# Altium PCB BaseBoard.PcbDoc
Units mm, origin at the board's own origin, x right, y up, seen from the top; angles counter-clockwise.
Board outline 99.92 x 100.03 mm, 2 copper layers (Top Layer, Bottom Layer); 120 components, 8 nets, 410 pads, 250 vias.
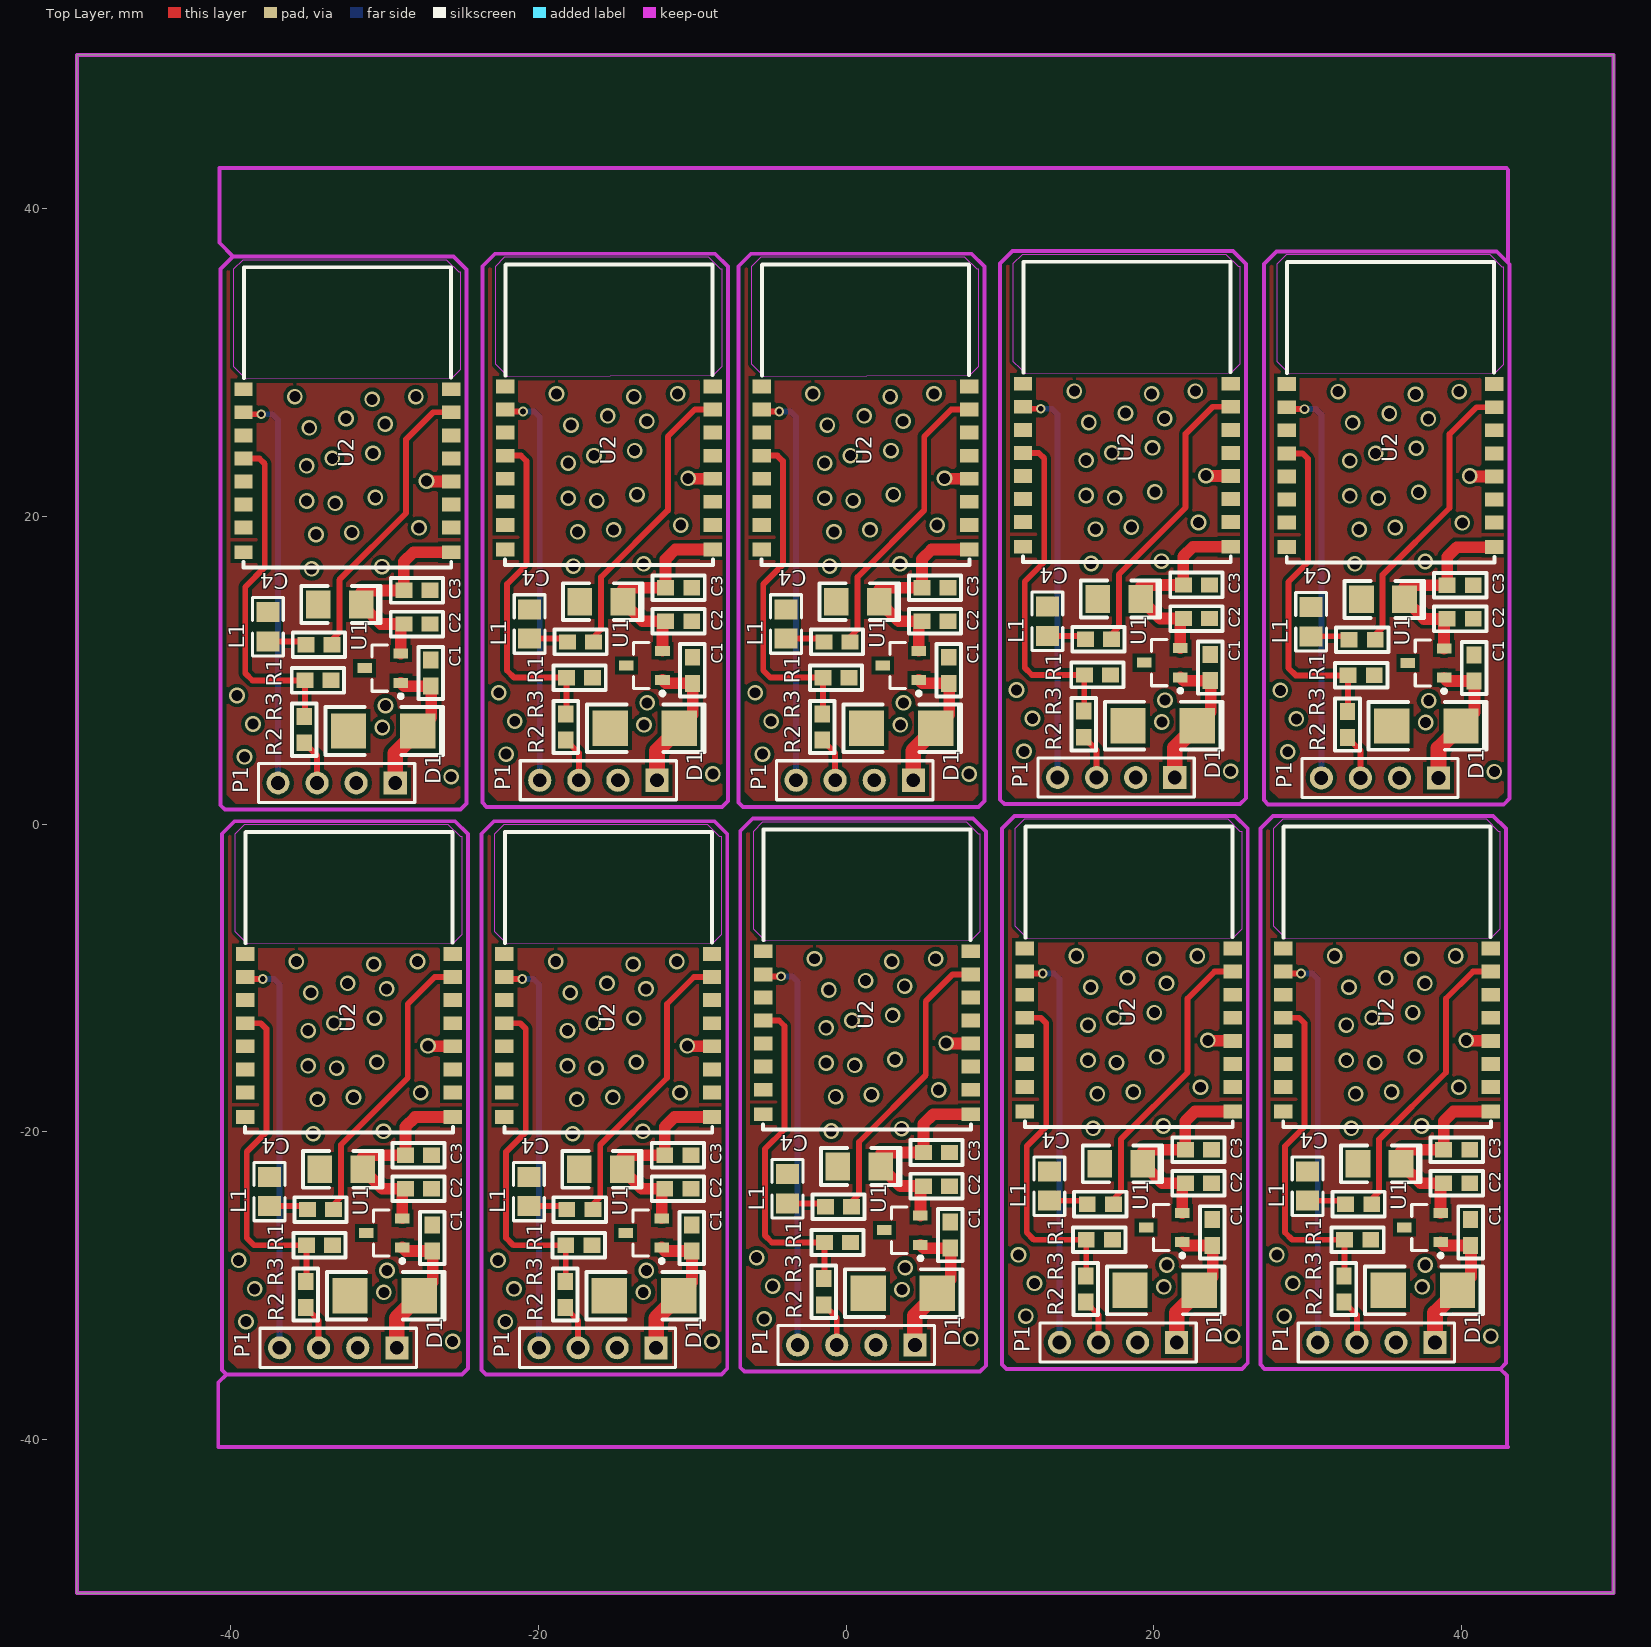
[diagram p0: Top Layer view]
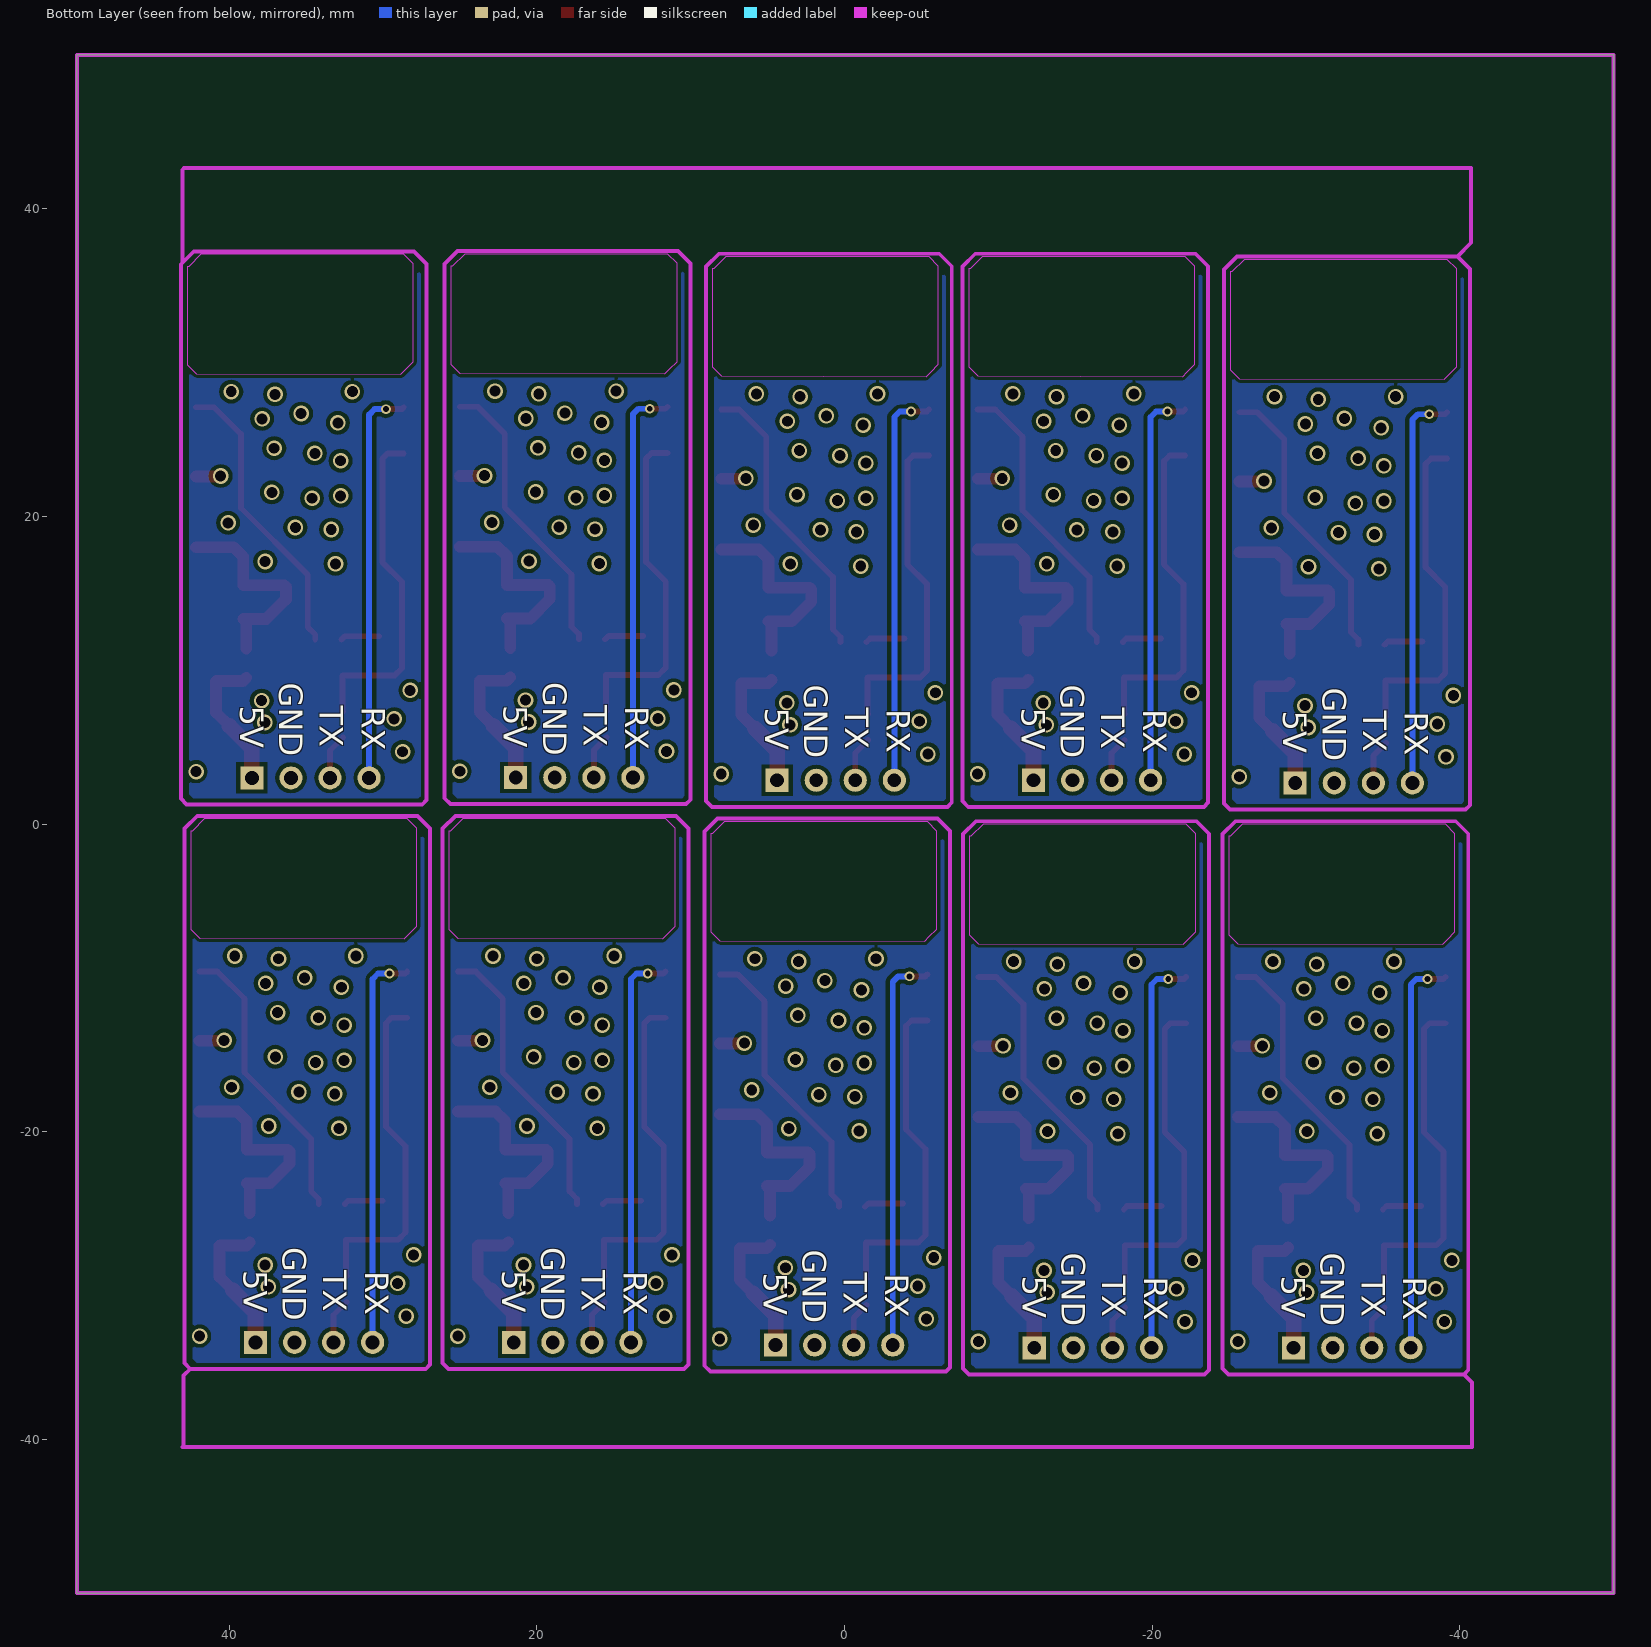
[diagram p1: Bottom Layer view, seen from below]

## Layer stack, top to bottom
Top Solder: solder mask 0.0102, Solder Resist, Dk 3.5
Top Layer: signal copper 0.0356
Dielectric 1: dielectric 0.32, FR-4, Dk 4.8
Bottom Layer: signal copper 0.0356
Bottom Solder: solder mask 0.0102, Solder Resist, Dk 3.5

## Board outline
-50.013,-50.013 -50.013,50.013 49.911,50.013 49.911,-50.013

## Design rules (kind name [scope] priority, off if disabled: settings)
Clearance [All] p1: gap=0.254
PolygonConnect [All] p1: connectstyle=Relief reliefconductorwidth=0.254 reliefentries=4 polygonreliefangle="90 Angle" airgapwidth=0.254
RoutingVias [All] p1: holewidth=0.711 width=1.016 viastyle="Through Hole" minholewidth=0.381 minwidth=0.635 maxholewidth=0.711 maxwidth=1.016
SolderMaskExpansion [All] p1: expansion=0.102
Width [All] p1: maxlimit=1.524 minlimit=0.254 preferedwidth=0.508
30 further rules are at their usual default settings.

## Components (designator, comment, footprint, x,y, rotation, side; value= is the part's Value field where it differs from the comment)
C1 "1uF" 0603 -27.011,9.816 r270 top
C1 "1uF" 0603 -9.993,9.994 r270 top
C1 "1uF" 0603 6.677,9.994 r270 top
C1 "1uF" 0603 23.677,10.172 r270 top
C1 "1uF" 0603 40.829,10.146 r270 top
C1 "1uF" 0603 40.601,-26.557 r270 top
C1 "1uF" 0603 23.804,-26.557 r270 top
C1 "1uF" 0603 6.778,-26.734 r270 top
C1 "1uF" 0603 -10.044,-26.912 r270 top
C1 "1uF" 0603 -26.909,-26.912 r270 top
C2 "1uF" 0603 -27.901,13.015 r180 top
C2 "1uF" 0603 -10.883,13.193 r180 top
C2 "1uF" 0603 5.787,13.193 r180 top
C2 "1uF" 0603 22.787,13.37 r180 top
C2 "1uF" 0603 39.939,13.345 r180 top
C2 "1uF" 0603 39.711,-23.358 r180 top
C2 "1uF" 0603 22.914,-23.358 r180 top
C2 "1uF" 0603 5.888,-23.536 r180 top
C2 "1uF" 0603 -10.934,-23.714 r180 top
C2 "1uF" 0603 -27.799,-23.714 r180 top
C3 "0.1uF" 0603 -27.901,15.199 r180 top
C3 "0.1uF" 0603 -10.883,15.377 r180 top
C3 "0.1uF" 0603 5.787,15.377 r180 top
C3 "0.1uF" 0603 22.787,15.555 r180 top
C3 "0.1uF" 0603 39.939,15.529 r180 top
C3 "0.1uF" 0603 39.711,-21.174 r180 top
C3 "0.1uF" 0603 22.914,-21.174 r180 top
C3 "0.1uF" 0603 5.888,-21.351 r180 top
C3 "0.1uF" 0603 -10.934,-21.529 r180 top
C3 "0.1uF" 0603 -27.799,-21.529 r180 top
C4 "10uF/16V" 1206 -32.931,14.275 r180 top
C4 "10uF/16V" 1206 -15.913,14.453 r180 top
C4 "10uF/16V" 1206 0.756,14.453 r180 top
C4 "10uF/16V" 1206 17.756,14.63 r180 top
C4 "10uF/16V" 1206 34.909,14.605 r180 top
C4 "10uF/16V" 1206 34.68,-22.098 r180 top
C4 "10uF/16V" 1206 17.883,-22.098 r180 top
C4 "10uF/16V" 1206 0.858,-22.276 r180 top
C4 "10uF/16V" 1206 -15.964,-22.454 r180 top
C4 "10uF/16V" 1206 -32.83,-22.454 r180 top
D1 "TVS" DO214-AC -30.101,6.045 r0 top
D1 "TVS" DO214-AC -13.083,6.223 r0 top
D1 "TVS" DO214-AC 3.587,6.223 r0 top
D1 "TVS" DO214-AC 20.587,6.401 r0 top
D1 "TVS" DO214-AC 37.739,6.375 r0 top
D1 "TVS" DO214-AC 37.511,-30.328 r0 top
D1 "TVS" DO214-AC 20.714,-30.328 r0 top
D1 "TVS" DO214-AC 3.688,-30.505 r0 top
D1 "TVS" DO214-AC -13.134,-30.683 r0 top
D1 "TVS" DO214-AC -29.999,-30.683 r0 top
L1 "LED" 0805 -37.592,12.827 r90 top
L1 "LED" 0805 -20.574,13.005 r90 top
L1 "LED" 0805 -3.904,13.005 r90 top
L1 "LED" 0805 13.096,13.183 r90 top
L1 "LED" 0805 30.248,13.157 r90 top
L1 "LED" 0805 30.02,-23.546 r90 top
L1 "LED" 0805 13.223,-23.546 r90 top
L1 "LED" 0805 -3.803,-23.724 r90 top
L1 "LED" 0805 -20.625,-23.901 r90 top
L1 "LED" 0805 -37.49,-23.901 r90 top
P1 "Header 4" HDR1X4 -29.312,2.667 r180 top
P1 "Header 4" HDR1X4 -12.294,2.845 r180 top
P1 "Header 4" HDR1X4 4.376,2.845 r180 top
P1 "Header 4" HDR1X4 21.376,3.023 r180 top
P1 "Header 4" HDR1X4 38.529,2.997 r180 top
P1 "Header 4" HDR1X4 38.3,-33.706 r180 top
P1 "Header 4" HDR1X4 21.503,-33.706 r180 top
P1 "Header 4" HDR1X4 4.478,-33.884 r180 top
P1 "Header 4" HDR1X4 -12.344,-34.061 r180 top
P1 "Header 4" HDR1X4 -29.21,-34.061 r180 top
R1 "470" 0603 -34.276,11.669 r180 top
R1 "470" 0603 -17.258,11.846 r180 top
R1 "470" 0603 -0.589,11.846 r180 top
R1 "470" 0603 16.411,12.024 r180 top
R1 "470" 0603 33.564,11.999 r180 top
R1 "470" 0603 33.335,-24.704 r180 top
R1 "470" 0603 16.538,-24.704 r180 top
R1 "470" 0603 -0.487,-24.882 r180 top
R1 "470" 0603 -17.309,-25.06 r180 top
R1 "470" 0603 -34.175,-25.06 r180 top
R2 "2.2K" 0603 -35.24,6.133 r270 top
R2 "2.2K" 0603 -18.222,6.311 r270 top
R2 "2.2K" 0603 -1.552,6.311 r270 top
R2 "2.2K" 0603 15.448,6.489 r270 top
R2 "2.2K" 0603 32.6,6.463 r270 top
R2 "2.2K" 0603 32.372,-30.24 r270 top
R2 "2.2K" 0603 15.575,-30.24 r270 top
R2 "2.2K" 0603 -1.45,-30.417 r270 top
R2 "2.2K" 0603 -18.273,-30.595 r270 top
R2 "2.2K" 0603 -35.138,-30.595 r270 top
R3 "4.7K" 0603 -34.341,9.347 r180 top
R3 "4.7K" 0603 -17.323,9.525 r180 top
R3 "4.7K" 0603 -0.653,9.525 r180 top
R3 "4.7K" 0603 16.347,9.703 r180 top
R3 "4.7K" 0603 33.499,9.677 r180 top
R3 "4.7K" 0603 33.271,-27.026 r180 top
R3 "4.7K" 0603 16.474,-27.026 r180 top
R3 "4.7K" 0603 -0.551,-27.203 r180 top
R3 "4.7K" 0603 -17.374,-27.381 r180 top
R3 "4.7K" 0603 -34.239,-27.381 r180 top
U1 "AP7313" AP7313-33SAG-7 -30.124,10.135 r180 top
U1 "AP7313" AP7313-33SAG-7 -13.106,10.312 r180 top
U1 "AP7313" AP7313-33SAG-7 3.563,10.312 r180 top
U1 "AP7313" AP7313-33SAG-7 20.563,10.49 r180 top
U1 "AP7313" AP7313-33SAG-7 37.716,10.465 r180 top
U1 "AP7313" AP7313-33SAG-7 37.487,-26.238 r180 top
U1 "AP7313" AP7313-33SAG-7 20.69,-26.238 r180 top
U1 "AP7313" AP7313-33SAG-7 3.665,-26.416 r180 top
U1 "AP7313" AP7313-33SAG-7 -13.157,-26.594 r180 top
U1 "AP7313" AP7313-33SAG-7 -30.023,-26.594 r180 top
U2 "HM-13" HM-13 -39.179,16.673 r0 top
U2 "HM-13" HM-13 -22.161,16.851 r0 top
U2 "HM-13" HM-13 -5.492,16.851 r0 top
U2 "HM-13" HM-13 11.508,17.029 r0 top
U2 "HM-13" HM-13 28.661,17.003 r0 top
U2 "HM-13" HM-13 28.432,-19.7 r0 top
U2 "HM-13" HM-13 11.635,-19.7 r0 top
U2 "HM-13" HM-13 -5.39,-19.878 r0 top
U2 "HM-13" HM-13 -22.212,-20.055 r0 top
U2 "HM-13" HM-13 -39.078,-20.055 r0 top

## Footprints (in the part's own frame and the unit in brackets; to place one, negate y for a bottom-side part, rotate by r counter-clockwise, add the part's x,y. Pads: shape width x height; smd on the part's side, far side on the other; paste and mask are expansions set on the pad)
0603 [mm]
  rect 1.1x1 smd: 1(-0.85,0.01) 2(0.85,0.01)
  silkscreen extent -1.7,-0.79 1.7,0.81
0805 [mm]
  rect 1.3x1.5 smd: 1(-0.95,0) 2(0.95,0)
  silkscreen extent -1.9,-1 1.9,1
1206 [mm]
  rect 1.6x1.8 smd: 1(-1.41,0) 2(1.39,0)
  silkscreen extent -2.68,-1.2 2.49,1.2
AP7313-33SAG-7 [mm] "SOT23, 3-Leads, Body 2.90x2.40mm, Pitch 0.95mm, IPC Medium Density"
  rect 0.95x0.65 smd: 1(-1.175,0.95) 2(-1.175,-0.95) 3(1.175,0)
  silkscreen extent -1.3,-1.5 0.7,1.95
DO214-AC [mm]
  rect 2.3x2.3 smd: 1(-2.25,0) 2(2.25,0)
  silkscreen extent -3.75,-1.55 3.9,1.55
HDR1X4 [mm] "Connector; Header; 4 Position"
  rect 1.5x1.5 hole 0.9: 1(0,0)
  round 1.5 hole 0.9: 2(2.54,0) 3(5.08,0) 4(7.62,0)
  silkscreen extent -1.27,-1.27 8.89,1.27
HM-13 [mm]
  rect 1.2x0.9 smd: 1(0,11.6) 2(0,10.1) 3(0,8.6) 4(0,7.1) 5(0,5.6) 6(0,4.1) 7(0,2.6) 8(0,1) 9(13.5,1) 10(13.5,2.6) 11(13.5,4.1) 12(13.5,5.6) 13(13.5,7.1) 14(13.5,8.6) 15(13.5,10.1) 16(13.5,11.6)
  silkscreen extent 0,0 13.51,19.53

## Part data
C1 C1 C1 C1 C1 C1 C1 C1 C1 C1 C2 C2 C2 C2 C2 C2 C2 C2 C2 C2 C3 C3 C3 C3 C3 C3 C3 C3 C3 C3: library part Cap1, "ceramic"
C4 C4 C4 C4 C4 C4 C4 C4 C4 C4: library part Cap3, "aluminum"
D1 D1 D1 D1 D1 D1 D1 D1 D1 D1: library part 6V8A-TVS
P1 P1 P1 P1 P1 P1 P1 P1 P1 P1: "Header, 4-Pin"
R1 R1 R1 R1 R1 R1 R1 R1 R1 R1 R2 R2 R2 R2 R2 R2 R2 R2 R2 R2 R3 R3 R3 R3 R3 R3 R3 R3 R3 R3: library part Res
U1 U1 U1 U1 U1 U1 U1 U1 U1 U1: library part AP7313-33SAG-7

## Via types
v1: diameter 1.016, hole 0.711, Top Layer to Bottom Layer, 240 vias
v2: diameter 0.635, hole 0.381, Top Layer to Bottom Layer, 10 vias

## Nets (pads, with @x,y where several pads share a name; then routed paths per layer and width w, separated by ;. In a path a pad name is that pad's centre, name@x,y a point inside that pad or via, vN(x,y) a via of type N, cw(c..) or ccw(c..) an arc to the next point about the centre after c; other vN are vias at no path point)
3.3V: 
5V: 
GND: 
NetL1_1: 
NetR1_1: 
NetR2_1: 
RX: 
TX: 
pads on no net: C1.1 C1.2 C2.1 C2.2 C3.1 C3.2 C4.1 C4.2 D1.1 D1.2 L1.1 L1.2 P1.1 P1.2 P1.3 P1.4 R1.1 R1.2 R2.1 R2.2 R3.1 R3.2 U1.1 U1.2 U1.3 U2.1 U2.2 U2.3 U2.4 U2.5 U2.6 U2.7 U2.8 U2.9 U2.10 U2.11 U2.12 U2.13 U2.14 U2.15 U2.16
copper on no net: | length 977.5
  Top Layer w0.381: -39.179,23.773 -38.149,23.773 -37.795,23.419 -37.795,16.688 -39.065,15.418 -39.065,9.804 -38.598,9.337 -35.191,9.337 -35.191,7.022 -35.23,6.983 ; -39.179,26.773 -39.051,26.645 v2(-38.024,26.645) ; -39.078,-12.955 -38.048,-12.955 -37.694,-13.31 -37.694,-20.041 -38.964,-21.311 -38.964,-26.924 -38.496,-27.391 -35.089,-27.391 -35.089,-29.706 -35.128,-29.745 ; -39.078,-9.955 -38.949,-10.084 v2(-37.922,-10.084) ; -37.592,11.877 -35.345,11.877 -35.126,11.659 ; -37.49,-24.851 -35.243,-24.851 -35.025,-25.07 ; -35.23,5.283 -34.392,4.445 -34.392,2.667 ; -35.128,-31.445 -34.29,-32.283 -34.29,-34.061 ; -33.426,11.659 -33.426,11.989 -32.944,12.471 -32.944,15.875 -28.6,20.218 -28.6,25.019 -26.846,26.773 -25.679,26.773 ; -33.325,-25.07 -33.325,-24.74 -32.842,-24.257 -32.842,-20.853 -28.499,-16.51 -28.499,-11.709 -26.745,-9.955 -25.578,-9.955 ; -22.212,-12.955 -21.182,-12.955 -20.828,-13.31 -20.828,-20.041 -22.098,-21.311 -22.098,-26.924 -21.631,-27.391 -18.224,-27.391 -18.224,-29.706 -18.263,-29.745 ; -22.212,-9.955 -22.084,-10.084 v2(-21.057,-10.084) ; -22.161,23.951 -21.131,23.951 -20.777,23.597 -20.777,16.866 -22.047,15.596 -22.047,9.982 -21.58,9.515 -18.173,9.515 -18.173,7.2 -18.212,7.161 ; -22.161,26.951 -22.033,26.822 v2(-21.006,26.822) ; -20.625,-24.851 -18.378,-24.851 -18.159,-25.07 ; -20.574,12.055 -18.327,12.055 -18.108,11.836 ; -18.263,-31.445 -17.424,-32.283 -17.424,-34.061 ; -18.212,5.461 -17.374,4.623 -17.374,2.845 ; -16.459,-25.07 -16.459,-24.74 -15.977,-24.257 -15.977,-20.853 -11.633,-16.51 -11.633,-11.709 -9.879,-9.955 -8.712,-9.955 ; -16.408,11.836 -16.408,12.167 -15.926,12.649 -15.926,16.053 -11.582,20.396 -11.582,25.197 -9.828,26.951 -8.661,26.951 ; -5.492,23.951 -4.462,23.951 -4.107,23.597 -4.107,16.866 -5.377,15.596 -5.377,9.982 -4.91,9.515 -1.503,9.515 -1.503,7.2 -1.542,7.161 ; -5.492,26.951 -5.363,26.822 v2(-4.336,26.822) ; -5.39,-12.778 -4.36,-12.778 -4.006,-13.132 -4.006,-19.863 -5.276,-21.133 -5.276,-26.746 -4.809,-27.213 -1.401,-27.213 -1.401,-29.528 -1.44,-29.567 ; -5.39,-9.778 -5.262,-9.906 v2(-4.234,-9.906) ; -3.904,12.055 -1.657,12.055 -1.439,11.836 ; -3.803,-24.674 -1.555,-24.674 -1.337,-24.892 ; -1.542,5.461 -0.704,4.623 -0.704,2.845 ; -1.44,-31.267 -0.602,-32.106 -0.602,-33.884 ; 0.261,11.836 0.261,12.167 0.744,12.649 0.744,16.053 5.087,20.396 5.087,25.197 6.841,26.951 8.008,26.951 ; 0.363,-24.892 0.363,-24.562 0.846,-24.079 0.846,-20.676 5.189,-16.332 5.189,-11.532 6.943,-9.778 8.11,-9.778 ; 11.508,24.129 12.538,24.129 12.893,23.774 12.893,17.043 11.623,15.773 11.623,10.16 12.09,9.693 15.497,9.693 15.497,7.378 15.458,7.339 ; 11.508,27.129 11.637,27 v2(12.664,27) ; 11.635,-12.6 12.665,-12.6 13.02,-12.954 13.02,-19.685 11.75,-20.955 11.75,-26.568 12.217,-27.036 15.624,-27.036 15.624,-29.351 15.585,-29.39 ; 11.635,-9.6 11.764,-9.728 v2(12.791,-9.728) ; 13.096,12.233 15.343,12.233 15.561,12.014 ; 13.223,-24.496 15.47,-24.496 15.688,-24.714 ; 15.458,5.639 16.296,4.801 16.296,3.023 ; 15.585,-31.09 16.423,-31.928 16.423,-33.706 ; 17.261,12.014 17.261,12.344 17.744,12.827 17.744,16.231 22.087,20.574 22.087,25.375 23.841,27.129 25.008,27.129 ; 17.388,-24.714 17.388,-24.384 17.871,-23.901 17.871,-20.498 22.214,-16.154 22.214,-11.354 23.968,-9.6 25.135,-9.6 ; 28.432,-12.6 29.462,-12.6 29.816,-12.954 29.816,-19.685 28.546,-20.955 28.546,-26.568 29.014,-27.036 32.421,-27.036 32.421,-29.351 32.382,-29.39 ; 28.432,-9.6 28.561,-9.728 v2(29.588,-9.728) ; 28.661,24.103 29.691,24.103 30.045,23.749 30.045,17.018 28.775,15.748 28.775,10.135 29.242,9.667 32.649,9.667 32.649,7.352 32.61,7.313 ; 28.661,27.103 28.789,26.975 v2(29.816,26.975) ; 30.02,-24.496 32.267,-24.496 32.485,-24.714 ; 30.248,12.207 32.495,12.207 32.714,11.989 ; 32.382,-31.09 33.22,-31.928 33.22,-33.706 ; 32.61,5.613 33.449,4.775 33.449,2.997 ; 34.185,-24.714 34.185,-24.384 34.668,-23.901 34.668,-20.498 39.011,-16.154 39.011,-11.354 40.765,-9.6 41.932,-9.6 ; 34.414,11.989 34.414,12.319 34.896,12.802 34.896,16.205 39.24,20.549 39.24,25.349 40.994,27.103 42.161,27.103
  Top Layer w0.762: -28.949,9.185 -28.731,8.966 -27.001,8.966 -26.975,8.94 -26.975,6.921 -27.851,6.045 ; -28.949,11.085 -28.949,12.806 -28.751,13.005 -30.251,13.005 -31.521,14.275 -31.521,15.088 -31.42,15.189 -28.751,15.189 -28.751,17.045 -28.123,17.673 -25.679,17.673 ; -28.848,-27.544 -28.629,-27.762 -26.899,-27.762 -26.873,-27.788 -26.873,-29.807 -27.749,-30.683 ; -28.848,-25.644 -28.848,-23.922 -28.649,-23.724 -30.15,-23.724 -31.42,-22.454 -31.42,-21.641 -31.318,-21.539 -28.649,-21.539 -28.649,-19.683 -28.022,-19.055 -25.578,-19.055 ; v1(-27.28,22.301) -27.251,22.273 -25.679,22.273 ; v1(-27.178,-14.427) -27.15,-14.455 -25.578,-14.455 ; -11.982,-27.544 -11.764,-27.762 -10.034,-27.762 -10.008,-27.788 -10.008,-29.807 -10.884,-30.683 ; -11.982,-25.644 -11.982,-23.922 -11.784,-23.724 -13.284,-23.724 -14.554,-22.454 -14.554,-21.641 -14.453,-21.539 -11.784,-21.539 -11.784,-19.683 -11.156,-19.055 -8.712,-19.055 ; -11.931,9.362 -11.713,9.144 -9.983,9.144 -9.957,9.118 -9.957,7.099 -10.833,6.223 ; -11.931,11.262 -11.931,12.984 -11.733,13.183 -13.233,13.183 -14.503,14.453 -14.503,15.265 -14.402,15.367 -11.733,15.367 -11.733,17.223 -11.105,17.851 -8.661,17.851 ; v1(-10.312,-14.427) -10.284,-14.455 -8.712,-14.455 ; v1(-10.262,22.479) -10.233,22.451 -8.661,22.451 ; 4.738,9.362 4.957,9.144 6.687,9.144 6.713,9.118 6.713,7.099 5.837,6.223 ; 4.738,11.262 4.738,12.984 4.937,13.183 3.436,13.183 2.166,14.453 2.166,15.265 2.268,15.367 4.937,15.367 4.937,17.223 5.565,17.851 8.008,17.851 ; 4.84,-27.366 5.058,-27.584 6.788,-27.584 6.815,-27.611 6.815,-29.629 5.938,-30.505 ; 4.84,-25.466 4.84,-23.744 5.038,-23.546 3.538,-23.546 2.268,-22.276 2.268,-21.463 2.37,-21.361 5.038,-21.361 5.038,-19.505 5.666,-18.878 8.11,-18.878 ; v1(6.408,22.479) 6.436,22.451 8.008,22.451 ; v1(6.51,-14.249) 6.538,-14.278 8.11,-14.278 ; 21.738,9.54 21.957,9.322 23.687,9.322 23.713,9.296 23.713,7.277 22.837,6.401 ; 21.738,11.44 21.738,13.162 21.937,13.36 20.436,13.36 19.166,14.63 19.166,15.443 19.268,15.545 21.937,15.545 21.937,17.401 22.565,18.029 25.008,18.029 ; 21.865,-27.188 22.084,-27.407 23.814,-27.407 23.84,-27.433 23.84,-29.451 22.964,-30.328 ; 21.865,-25.288 21.865,-23.566 22.064,-23.368 20.563,-23.368 19.293,-22.098 19.293,-21.285 19.395,-21.184 22.064,-21.184 22.064,-19.328 22.692,-18.7 25.135,-18.7 ; v1(23.408,22.657) 23.436,22.629 25.008,22.629 ; v1(23.535,-14.072) 23.563,-14.1 25.135,-14.1 ; 38.662,-27.188 38.881,-27.407 40.611,-27.407 40.637,-27.433 40.637,-29.451 39.761,-30.328 ; 38.662,-25.288 38.662,-23.566 38.861,-23.368 37.36,-23.368 36.09,-22.098 36.09,-21.285 36.192,-21.184 38.861,-21.184 38.861,-19.328 39.488,-18.7 41.932,-18.7 ; 38.891,9.515 39.109,9.296 40.839,9.296 40.865,9.27 40.865,7.252 39.989,6.375 ; 38.891,11.415 38.891,13.137 39.089,13.335 37.589,13.335 36.319,14.605 36.319,15.418 36.42,15.519 39.089,15.519 39.089,17.375 39.717,18.003 42.161,18.003 ; v1(40.332,-14.072) 40.36,-14.1 41.932,-14.1 ; v1(40.561,22.631) 40.589,22.603 42.161,22.603
  Top Layer w1.016: -29.312,2.667 -29.312,4.585 -27.851,6.045 ; -29.21,-34.061 -29.21,-32.144 -27.749,-30.683 ; -12.344,-34.061 -12.344,-32.144 -10.884,-30.683 ; -12.294,2.845 -12.294,4.762 -10.833,6.223 ; 4.376,2.845 4.376,4.762 5.837,6.223 ; 4.478,-33.884 4.478,-31.966 5.938,-30.505 ; 21.376,3.023 21.376,4.94 22.837,6.401 ; 21.503,-33.706 21.503,-31.788 22.964,-30.328 ; 38.3,-33.706 38.3,-31.788 39.761,-30.328 ; 38.529,2.997 38.529,4.915 39.989,6.375
  Bottom Layer w0.381: v2(-38.024,26.645) -37.287,26.645 -36.932,26.289 -36.932,2.667 ; v2(-37.922,-10.084) -37.186,-10.084 -36.83,-10.439 -36.83,-34.061 ; v2(-21.057,-10.084) -20.32,-10.084 -19.964,-10.439 -19.964,-34.061 ; v2(-21.006,26.822) -20.269,26.822 -19.914,26.467 -19.914,2.845 ; v2(-4.336,26.822) -3.599,26.822 -3.244,26.467 -3.244,2.845 ; v2(-4.234,-9.906) -3.498,-9.906 -3.142,-10.262 -3.142,-33.884 ; v2(12.664,27) 13.401,27 13.756,26.645 13.756,3.023 ; v2(12.791,-9.728) 13.528,-9.728 13.883,-10.084 13.883,-33.706 ; v2(29.588,-9.728) 30.324,-9.728 30.68,-10.084 30.68,-33.706 ; v2(29.816,26.975) 30.553,26.975 30.909,26.619 30.909,2.997
  other v1: -25.578,-33.655 -8.712,-33.655 8.11,-33.477 25.135,-33.299 41.932,-33.299 -39.014,-32.36 -22.149,-32.36 -5.327,-32.182 11.699,-32.004 28.496,-32.004 -30.048,-30.455 -13.183,-30.455 3.64,-30.277 -38.456,-30.226 -21.59,-30.226 20.665,-30.099 37.462,-30.099 -4.768,-30.048 12.258,-29.87 29.054,-29.87 -29.845,-29.032 -12.979,-29.032 3.843,-28.854 20.868,-28.677 37.665,-28.677 -39.497,-28.372 -22.631,-28.372 -5.809,-28.194 11.216,-28.016 28.013,-28.016 -34.646,-20.142 -17.78,-20.142 -30.074,-19.99 -13.208,-19.99 -0.958,-19.964 3.614,-19.812 16.068,-19.787 32.864,-19.787 20.64,-19.634 37.436,-19.634 -34.366,-17.907 -17.501,-17.907 -32.029,-17.78 -15.164,-17.78 -0.678,-17.729 1.658,-17.602 16.347,-17.551 33.144,-17.551 -27.661,-17.475 -10.795,-17.475 18.684,-17.424 35.481,-17.424 6.027,-17.297 23.053,-17.12 39.849,-17.12 -33.122,-15.875 -16.256,-15.875 -34.976,-15.723 -18.11,-15.723 0.566,-15.697 -1.288,-15.545 17.592,-15.519 34.388,-15.519 -30.505,-15.494 -13.64,-15.494 15.737,-15.367 32.534,-15.367 3.182,-15.316 20.208,-15.138 37.005,-15.138 -34.976,-13.437 -18.11,-13.437 -1.288,-13.259 15.737,-13.081 32.534,-13.081 -33.299,-12.954 -16.434,-12.954 0.388,-12.776 -30.658,-12.624 -13.792,-12.624 17.414,-12.598 34.211,-12.598 3.03,-12.446 20.055,-12.268 36.852,-12.268 -34.798,-10.973 -17.932,-10.973 -1.11,-10.795 -29.87,-10.719 -13.005,-10.719 15.915,-10.617 32.712,-10.617 3.817,-10.541 -32.41,-10.363 -15.545,-10.363 20.843,-10.363 37.64,-10.363 1.277,-10.185 18.303,-10.008 35.1,-10.008 -30.709,-9.119 -13.843,-9.119 -35.738,-8.941 -27.864,-8.941 -18.872,-8.941 -10.998,-8.941 2.979,-8.941 -2.05,-8.763 5.824,-8.763 20.005,-8.763 36.801,-8.763 14.975,-8.585 22.849,-8.585 31.772,-8.585 39.646,-8.585 -25.679,3.073 -8.661,3.251 8.008,3.251 42.161,3.404 25.008,3.429 -39.116,4.369 -22.098,4.547 -5.428,4.547 28.724,4.699 11.572,4.724 -30.15,6.274 -13.132,6.452 3.538,6.452 -38.557,6.502 37.69,6.604 20.538,6.629 -21.539,6.68 -4.869,6.68 29.283,6.833 12.131,6.858 -29.947,7.696 -12.929,7.874 3.741,7.874 37.894,8.026 20.741,8.052 -39.599,8.357 -22.581,8.534 -5.911,8.534 28.242,8.687 11.089,8.712 -34.747,16.586 -30.175,16.739 -17.729,16.764 -1.059,16.764 -13.157,16.916 3.513,16.916 33.093,16.916 15.941,16.942 37.665,17.069 20.513,17.094 -34.468,18.821 -32.131,18.948 -17.45,18.999 -0.78,18.999 -15.113,19.126 1.557,19.126 33.372,19.152 16.22,19.177 -27.762,19.253 35.709,19.279 18.557,19.304 -10.744,19.431 5.926,19.431 40.078,19.583 22.926,19.609 -33.223,20.853 -35.077,21.006 -16.205,21.031 0.465,21.031 -18.059,21.184 -1.39,21.184 34.617,21.184 17.465,21.209 -30.607,21.234 32.763,21.336 15.61,21.361 -13.589,21.412 3.081,21.412 37.233,21.565 20.081,21.59 -35.077,23.292 -18.059,23.47 -1.39,23.47 32.763,23.622 15.61,23.647 -33.401,23.774 -16.383,23.952 0.287,23.952 -30.759,24.105 34.439,24.105 17.287,24.13 -13.741,24.282 2.928,24.282 37.081,24.435 19.928,24.46 -34.9,25.756 -17.882,25.933 -1.212,25.933 -29.972,26.01 32.941,26.086 15.788,26.111 -12.954,26.187 3.716,26.187 37.868,26.34 -32.512,26.365 20.716,26.365 -15.494,26.543 1.176,26.543 35.328,26.695 18.176,26.721 -30.81,27.61 -35.839,27.788 -27.965,27.788 -13.792,27.788 2.878,27.788 37.03,27.94 -18.821,27.965 -10.947,27.965 -2.152,27.965 5.722,27.965 19.878,27.965 32.001,28.118 39.875,28.118 14.848,28.143 22.722,28.143

## Polygon pours and split planes (outlines as drawn)
no net on Bottom Layer "GND" (solid, pour order 230): -39.853,1.176 -39.98,1.176 -40.462,1.659 -40.335,1.786 -40.335,35.364 -40.335,35.39 -39.421,36.304 -39.37,36.355 -26.162,36.355 -26.035,36.355 -25.222,35.542 -25.222,2.421 -25.222,1.608 -25.603,1.227
no net on Bottom Layer "GND" (solid, pour order 228): -22.835,1.354 -22.962,1.354 -23.444,1.836 -23.317,1.963 -23.317,35.542 -23.317,35.568 -22.403,36.482 -22.352,36.533 -9.144,36.533 -9.017,36.533 -8.204,35.72 -8.204,2.598 -8.204,1.786 -8.585,1.405
no net on Bottom Layer "GND" (solid, pour order 226): -6.165,1.354 -6.292,1.354 -6.774,1.836 -6.647,1.963 -6.647,35.542 -6.647,35.568 -5.733,36.482 -5.682,36.533 7.526,36.533 7.653,36.533 8.466,35.72 8.466,2.598 8.466,1.786 8.085,1.405
no net on Bottom Layer "GND" (solid, pour order 224): 10.835,1.532 10.708,1.532 10.226,2.014 10.353,2.141 10.353,35.72 10.353,35.745 11.267,36.66 11.318,36.711 24.526,36.711 24.653,36.711 25.466,35.898 25.466,2.776 25.466,1.963 25.085,1.582
no net on Bottom Layer "GND" (solid, pour order 222): 27.988,1.506 27.861,1.506 27.378,1.989 27.505,2.116 27.505,35.695 27.505,35.72 28.419,36.634 28.47,36.685 41.678,36.685 41.805,36.685 42.618,35.872 42.618,2.751 42.618,1.938 42.237,1.557
no net on Bottom Layer "GND" (solid, pour order 220): 27.759,-35.197 27.632,-35.197 27.149,-34.714 27.276,-34.587 27.276,-1.008 27.276,-0.983 28.191,-0.069 28.242,-0.018 41.45,-0.018 41.577,-0.018 42.389,-0.831 42.389,-33.952 42.389,-34.765 42.008,-35.146
no net on Bottom Layer "GND" (solid, pour order 218): 10.962,-35.197 10.835,-35.197 10.353,-34.714 10.48,-34.587 10.48,-1.008 10.48,-0.983 11.394,-0.069 11.445,-0.018 24.653,-0.018 24.78,-0.018 25.593,-0.831 25.593,-33.952 25.593,-34.765 25.212,-35.146
no net on Bottom Layer "GND" (solid, pour order 216): -6.063,-35.375 -6.19,-35.375 -6.673,-34.892 -6.546,-34.765 -6.546,-1.186 -6.546,-1.161 -5.631,-0.246 -5.581,-0.196 7.627,-0.196 7.754,-0.196 8.567,-1.008 8.567,-34.13 8.567,-34.943 8.186,-35.324
no net on Bottom Layer "GND" (solid, pour order 214): -22.885,-35.552 -23.012,-35.552 -23.495,-35.07 -23.368,-34.943 -23.368,-1.364 -23.368,-1.339 -22.454,-0.424 -22.403,-0.373 -9.195,-0.373 -9.068,-0.373 -8.255,-1.186 -8.255,-34.308 -8.255,-35.121 -8.636,-35.502
no net on Bottom Layer "GND" (solid, pour order 212): -39.751,-35.552 -39.878,-35.552 -40.361,-35.07 -40.234,-34.943 -40.234,-1.364 -40.234,-1.339 -39.319,-0.424 -39.268,-0.373 -26.06,-0.373 -25.933,-0.373 -25.121,-1.186 -25.121,-34.308 -25.121,-35.121 -25.502,-35.502
no net on Top Layer "GND" (solid, pour order 250): -39.539,1.297 -39.666,1.297 -40.225,1.856 -40.276,1.907 -40.276,36.12 -40.225,36.12 -39.641,36.705 -39.514,36.578 -25.62,36.578 -25.62,36.501 -25.086,35.968 -24.985,35.866 -24.985,3.481 -24.985,1.805 -25.239,1.551 -25.62,1.17 -39.514,1.17
no net on Top Layer "GND" (solid, pour order 248): -22.521,1.475 -22.648,1.475 -23.207,2.034 -23.258,2.084 -23.258,36.298 -23.207,36.298 -22.623,36.882 -22.496,36.755 -8.602,36.755 -8.602,36.679 -8.068,36.146 -7.967,36.044 -7.967,3.659 -7.967,1.983 -8.221,1.729 -8.602,1.348 -22.496,1.348
no net on Top Layer "GND" (solid, pour order 246): -5.851,1.475 -5.978,1.475 -6.537,2.034 -6.588,2.084 -6.588,36.298 -6.537,36.298 -5.953,36.882 -5.826,36.755 8.068,36.755 8.068,36.679 8.601,36.146 8.703,36.044 8.703,3.659 8.703,1.983 8.449,1.729 8.068,1.348 -5.826,1.348
no net on Top Layer "GND" (solid, pour order 244): 11.149,1.653 11.022,1.653 10.463,2.211 10.412,2.262 10.412,36.476 10.463,36.476 11.047,37.06 11.174,36.933 25.068,36.933 25.068,36.857 25.601,36.324 25.703,36.222 25.703,3.837 25.703,2.161 25.449,1.907 25.068,1.526 11.174,1.526
no net on Top Layer "GND" (solid, pour order 242): 28.301,1.627 28.174,1.627 27.615,2.186 27.565,2.237 27.565,36.451 27.615,36.451 28.2,37.035 28.327,36.908 42.22,36.908 42.22,36.832 42.754,36.298 42.855,36.197 42.855,3.812 42.855,2.135 42.601,1.881 42.22,1.5 28.327,1.5
no net on Top Layer "GND" (solid, pour order 240): 28.073,-35.076 27.946,-35.076 27.387,-34.517 27.336,-34.466 27.336,-0.252 27.387,-0.252 27.971,0.332 28.098,0.205 41.992,0.205 41.992,0.129 42.525,-0.405 42.627,-0.506 42.627,-32.891 42.627,-34.568 42.373,-34.822 41.992,-35.203 28.098,-35.203
no net on Top Layer "GND" (solid, pour order 238): 11.276,-35.076 11.149,-35.076 10.59,-34.517 10.539,-34.466 10.539,-0.252 10.59,-0.252 11.174,0.332 11.301,0.205 25.195,0.205 25.195,0.129 25.728,-0.405 25.83,-0.506 25.83,-32.891 25.83,-34.568 25.576,-34.822 25.195,-35.203 11.301,-35.203
no net on Top Layer "GND" (solid, pour order 236): -5.75,-35.254 -5.877,-35.254 -6.435,-34.695 -6.486,-34.644 -6.486,-0.43 -6.435,-0.43 -5.851,0.154 -5.724,0.027 8.17,0.027 8.17,-0.049 8.703,-0.583 8.805,-0.684 8.805,-33.069 8.805,-34.746 8.551,-35 8.17,-35.381 -5.724,-35.381
no net on Top Layer "GND" (solid, pour order 234): -22.572,-35.431 -22.699,-35.431 -23.258,-34.873 -23.308,-34.822 -23.308,-0.608 -23.258,-0.608 -22.673,-0.024 -22.546,-0.151 -8.653,-0.151 -8.653,-0.227 -8.119,-0.76 -8.018,-0.862 -8.018,-33.247 -8.018,-34.923 -8.272,-35.177 -8.653,-35.558 -22.546,-35.558
no net on Top Layer "GND" (solid, pour order 232): -39.437,-35.431 -39.564,-35.431 -40.123,-34.873 -40.174,-34.822 -40.174,-0.608 -40.123,-0.608 -39.539,-0.024 -39.412,-0.151 -25.518,-0.151 -25.518,-0.227 -24.985,-0.76 -24.883,-0.862 -24.883,-33.247 -24.883,-34.923 -25.137,-35.177 -25.518,-35.558 -39.412,-35.558

## Keep-outs
Keep-Out Layer:
  region: -39.002,28.918 -39.319,29.235 -39.802,29.718 -39.802,36.093 -39.192,36.703 -25.984,36.703 -25.197,35.916 -25.095,35.916 -25.095,29.54 -25.679,28.956
  region: -21.984,29.096 -22.301,29.413 -22.784,29.896 -22.784,36.271 -22.174,36.881 -8.966,36.881 -8.179,36.093 -8.077,36.093 -8.077,29.718 -8.661,29.134
  region: -5.314,29.096 -5.631,29.413 -6.114,29.896 -6.114,36.271 -5.504,36.881 7.704,36.881 8.491,36.093 8.593,36.093 8.593,29.718 8.008,29.134
  region: 11.686,29.273 11.369,29.591 10.886,30.074 10.886,36.449 11.496,37.059 24.704,37.059 25.491,36.271 25.593,36.271 25.593,29.896 25.008,29.312
  region: 28.838,29.248 28.521,29.566 28.038,30.048 28.038,36.424 28.648,37.033 41.856,37.033 42.643,36.246 42.745,36.246 42.745,29.87 42.161,29.286
  region: 28.61,-7.455 28.292,-7.137 27.81,-6.655 27.81,-0.279 28.419,0.33 41.627,0.33 42.415,-0.457 42.516,-0.457 42.516,-6.833 41.932,-7.417
  region: 11.813,-7.455 11.496,-7.137 11.013,-6.655 11.013,-0.279 11.623,0.33 24.831,0.33 25.618,-0.457 25.72,-0.457 25.72,-6.833 25.135,-7.417
  region: -5.212,-7.633 -5.53,-7.315 -6.012,-6.833 -6.012,-0.457 -5.403,0.152 7.805,0.152 8.593,-0.635 8.694,-0.635 8.694,-7.01 8.11,-7.595
  region: -22.034,-7.81 -22.352,-7.493 -22.835,-7.01 -22.835,-0.635 -22.225,-0.025 -9.017,-0.025 -8.23,-0.813 -8.128,-0.813 -8.128,-7.188 -8.712,-7.772
  region: -38.9,-7.81 -39.218,-7.493 -39.7,-7.01 -39.7,-0.635 -39.091,-0.025 -25.883,-0.025 -25.095,-0.813 -24.994,-0.813 -24.994,-7.188 -25.578,-7.772
  lines w0.254: 43.053,36.601 43.053,42.545 42.951,42.647 -40.742,42.647 -40.742,41.402 -40.742,38.913 -40.742,37.871 -40.742,37.795 -39.853,36.906 ; -40.284,-35.789 -40.818,-36.322 -40.818,-40.513 43.053,-40.513 42.977,-40.437 42.977,-35.868 42.542,-35.433 ; -40.284,-35.789 -40.564,-35.509 -40.564,-0.635 -39.751,0.178 -25.425,0.178 -24.587,-0.66 -24.587,-33.96 -24.587,-35.408 -24.968,-35.789 -37.998,-35.789 -40.284,-35.789 ; -39.853,36.906 -25.527,36.906 -24.689,36.068 -24.689,2.769 -24.689,1.321 -25.07,0.94 -38.1,0.94 -40.386,0.94 -40.665,1.219 -40.665,36.093 -39.853,36.906 ; 42.542,-35.433 29.512,-35.433 27.226,-35.433 26.946,-35.154 26.946,-0.279 27.759,0.533 42.085,0.533 42.923,-0.305 42.923,-33.604 42.923,-35.052 42.542,-35.433 ; -50.013,-50.013 -50.013,50.013 49.911,50.013 49.911,-50.013 -50.013,-50.013 ; -23.698,-35.509 -23.419,-35.789 -21.133,-35.789 -8.103,-35.789 -7.722,-35.408 -7.722,-33.96 -7.722,-0.66 -8.56,0.178 -22.885,0.178 -23.698,-0.635 -23.698,-35.509 ; -23.647,1.397 -23.647,36.271 -22.835,37.084 -8.509,37.084 -7.671,36.246 -7.671,2.946 -7.671,1.499 -8.052,1.118 -21.082,1.118 -23.368,1.118 -23.647,1.397 ; -6.978,1.397 -6.978,36.271 -6.165,37.084 8.161,37.084 8.999,36.246 8.999,2.946 8.999,1.499 8.618,1.118 -4.412,1.118 -6.698,1.118 -6.978,1.397 ; -6.876,-35.331 -6.597,-35.611 -4.311,-35.611 8.72,-35.611 9.101,-35.23 9.101,-33.782 9.101,-0.483 8.262,0.356 -6.063,0.356 -6.876,-0.457 -6.876,-35.331 ; 10.022,1.575 10.022,36.449 10.835,37.262 25.161,37.262 25.999,36.424 25.999,3.124 25.999,1.676 25.618,1.295 12.588,1.295 10.302,1.295 10.022,1.575 ; 10.149,-35.154 10.429,-35.433 12.715,-35.433 25.745,-35.433 26.126,-35.052 26.126,-33.604 26.126,-0.305 25.288,0.533 10.962,0.533 10.149,-0.279 10.149,-35.154 ; 27.175,1.549 27.175,36.424 27.988,37.236 42.313,37.236 43.151,36.398 43.151,3.099 43.151,1.651 42.77,1.27 29.74,1.27 27.454,1.27 27.175,1.549

## Silkscreen, mask and mechanical layers (free items; w line width, h text height)
Bottom Overlay:
  text "GND" at 19.598,9.22 h1.52 r90
  text "GND" at 36.751,9.195 h1.52 r90
  text "GND" at -14.072,9.042 h1.52 r90
  text "GND" at 2.598,9.042 h1.52 r90
  text "GND" at -31.09,8.865 h1.52 r90
  text "TX" at 16.957,7.722 h1.52 r90
  text "5V" at 22.138,7.722 h1.52 r90
  text "TX" at 34.109,7.696 h1.52 r90
  text "5V" at 39.291,7.696 h1.52 r90
  text "RX" at 14.239,7.645 h1.52 r90
  text "RX" at 31.391,7.62 h1.52 r90
  text "TX" at -16.713,7.544 h1.52 r90
  text "5V" at -11.532,7.544 h1.52 r90
  text "TX" at -0.043,7.544 h1.52 r90
  text "5V" at 5.138,7.544 h1.52 r90
  text "RX" at -19.431,7.468 h1.52 r90
  text "RX" at -2.761,7.468 h1.52 r90
  text "TX" at -33.731,7.366 h1.52 r90
  text "5V" at -28.55,7.366 h1.52 r90
  text "RX" at -36.449,7.29 h1.52 r90
  text "GND" at 19.725,-27.508 h1.52 r90
  text "GND" at 36.522,-27.508 h1.52 r90
  text "GND" at 2.7,-27.686 h1.52 r90
  text "GND" at -30.988,-27.864 h1.52 r90
  text "GND" at -14.122,-27.864 h1.52 r90
  text "TX" at 17.084,-29.007 h1.52 r90
  text "5V" at 22.265,-29.007 h1.52 r90
  text "TX" at 33.88,-29.007 h1.52 r90
  text "5V" at 39.062,-29.007 h1.52 r90
  text "RX" at 14.366,-29.083 h1.52 r90
  text "RX" at 31.163,-29.083 h1.52 r90
  text "TX" at 0.058,-29.185 h1.52 r90
  text "5V" at 5.24,-29.185 h1.52 r90
  text "RX" at -2.66,-29.261 h1.52 r90
  text "TX" at -33.63,-29.362 h1.52 r90
  text "5V" at -28.448,-29.362 h1.52 r90
  text "TX" at -16.764,-29.362 h1.52 r90
  text "5V" at -11.582,-29.362 h1.52 r90
  text "RX" at -36.347,-29.439 h1.52 r90
  text "RX" at -19.482,-29.439 h1.52 r90